# Altium PCB bag_alamr_v1.PcbDoc
Units mil, origin at the board's own origin, x right, y up, seen from the top; angles counter-clockwise.
Board outline 1440 x 1440 mil, 4 copper layers (Top Layer, GND, 3v3, Bottom Layer), stack 29.645 mil thick; 50 components, 43 nets, 179 pads, 139 vias.
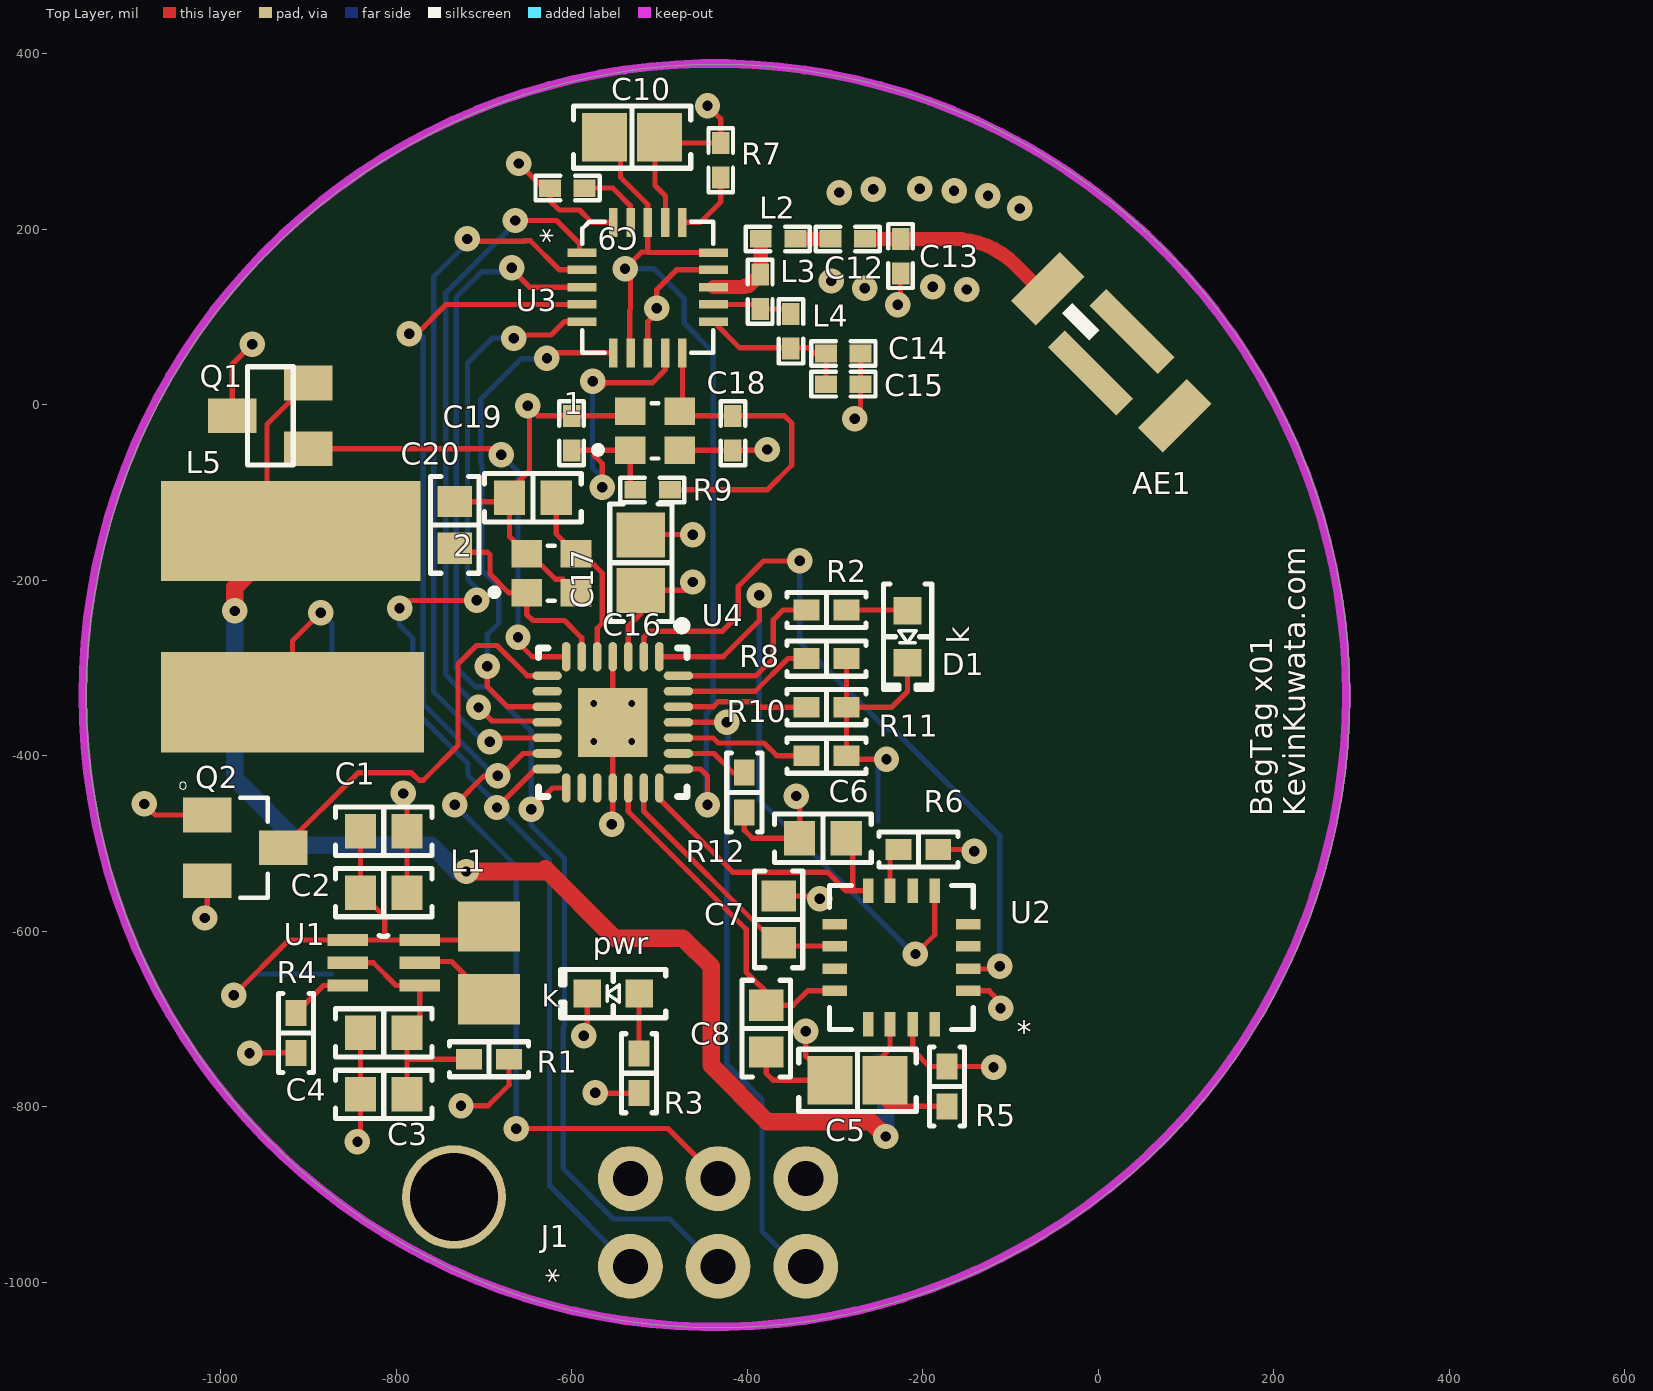
[diagram p0: Top Layer view]
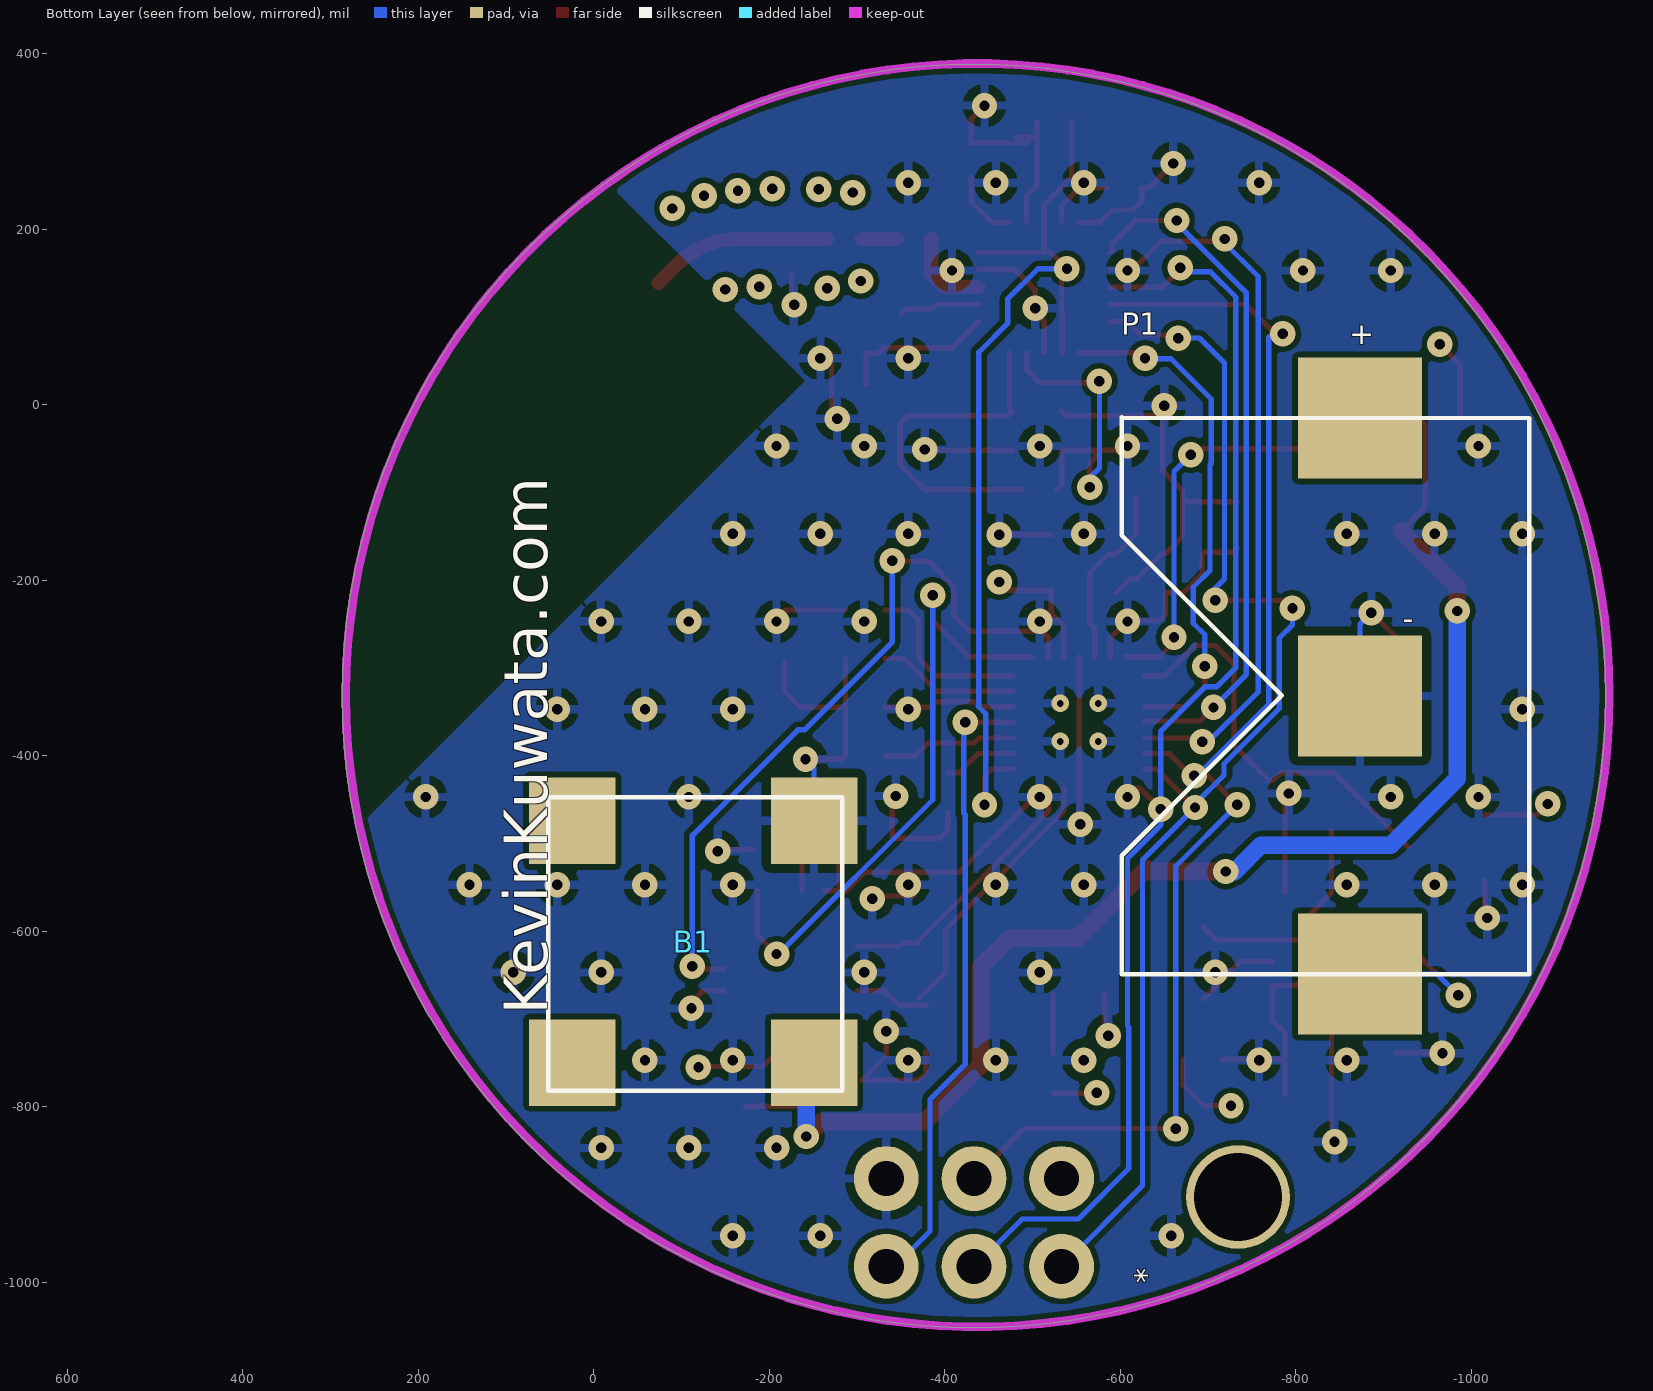
[diagram p1: Bottom Layer view, seen from below]
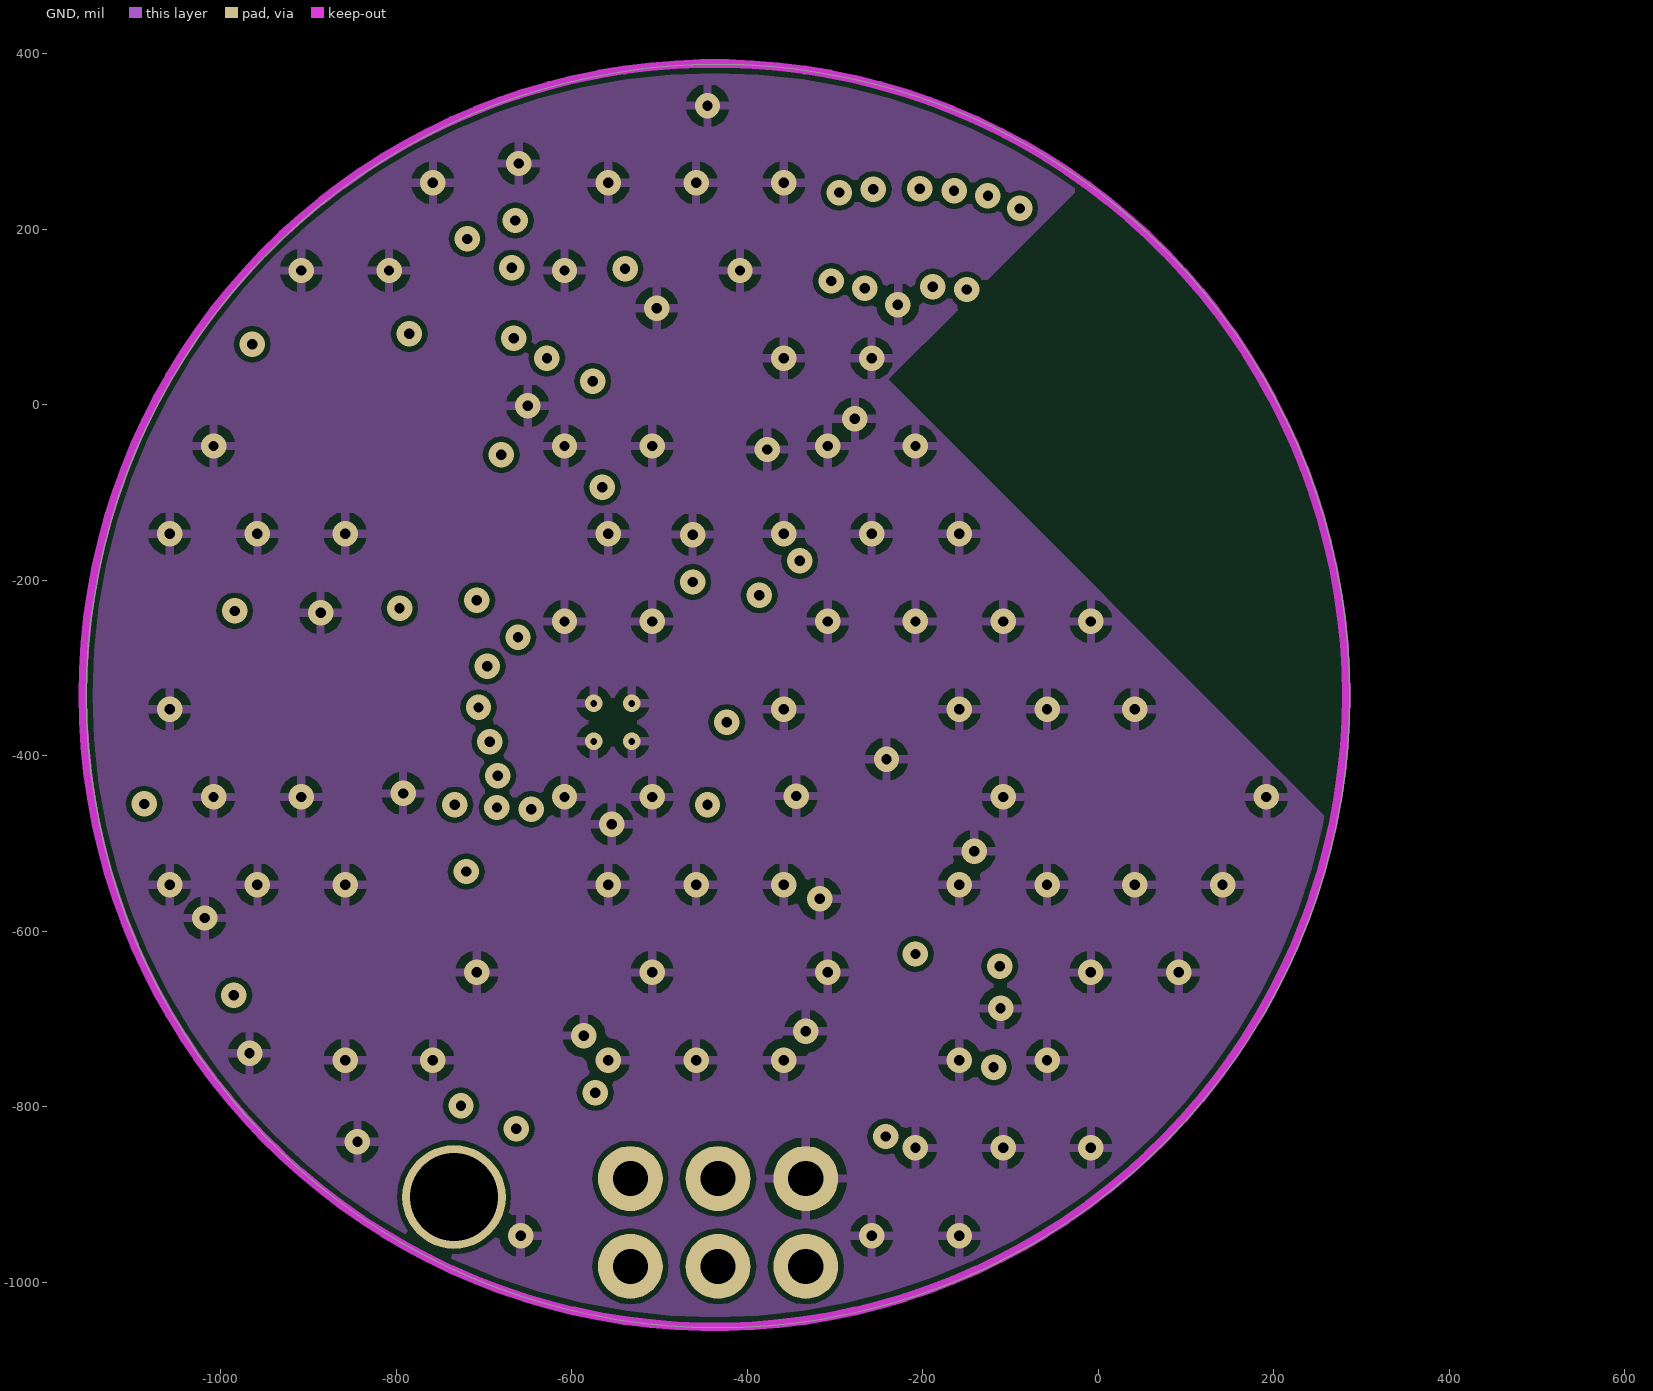
[diagram p2: GND]
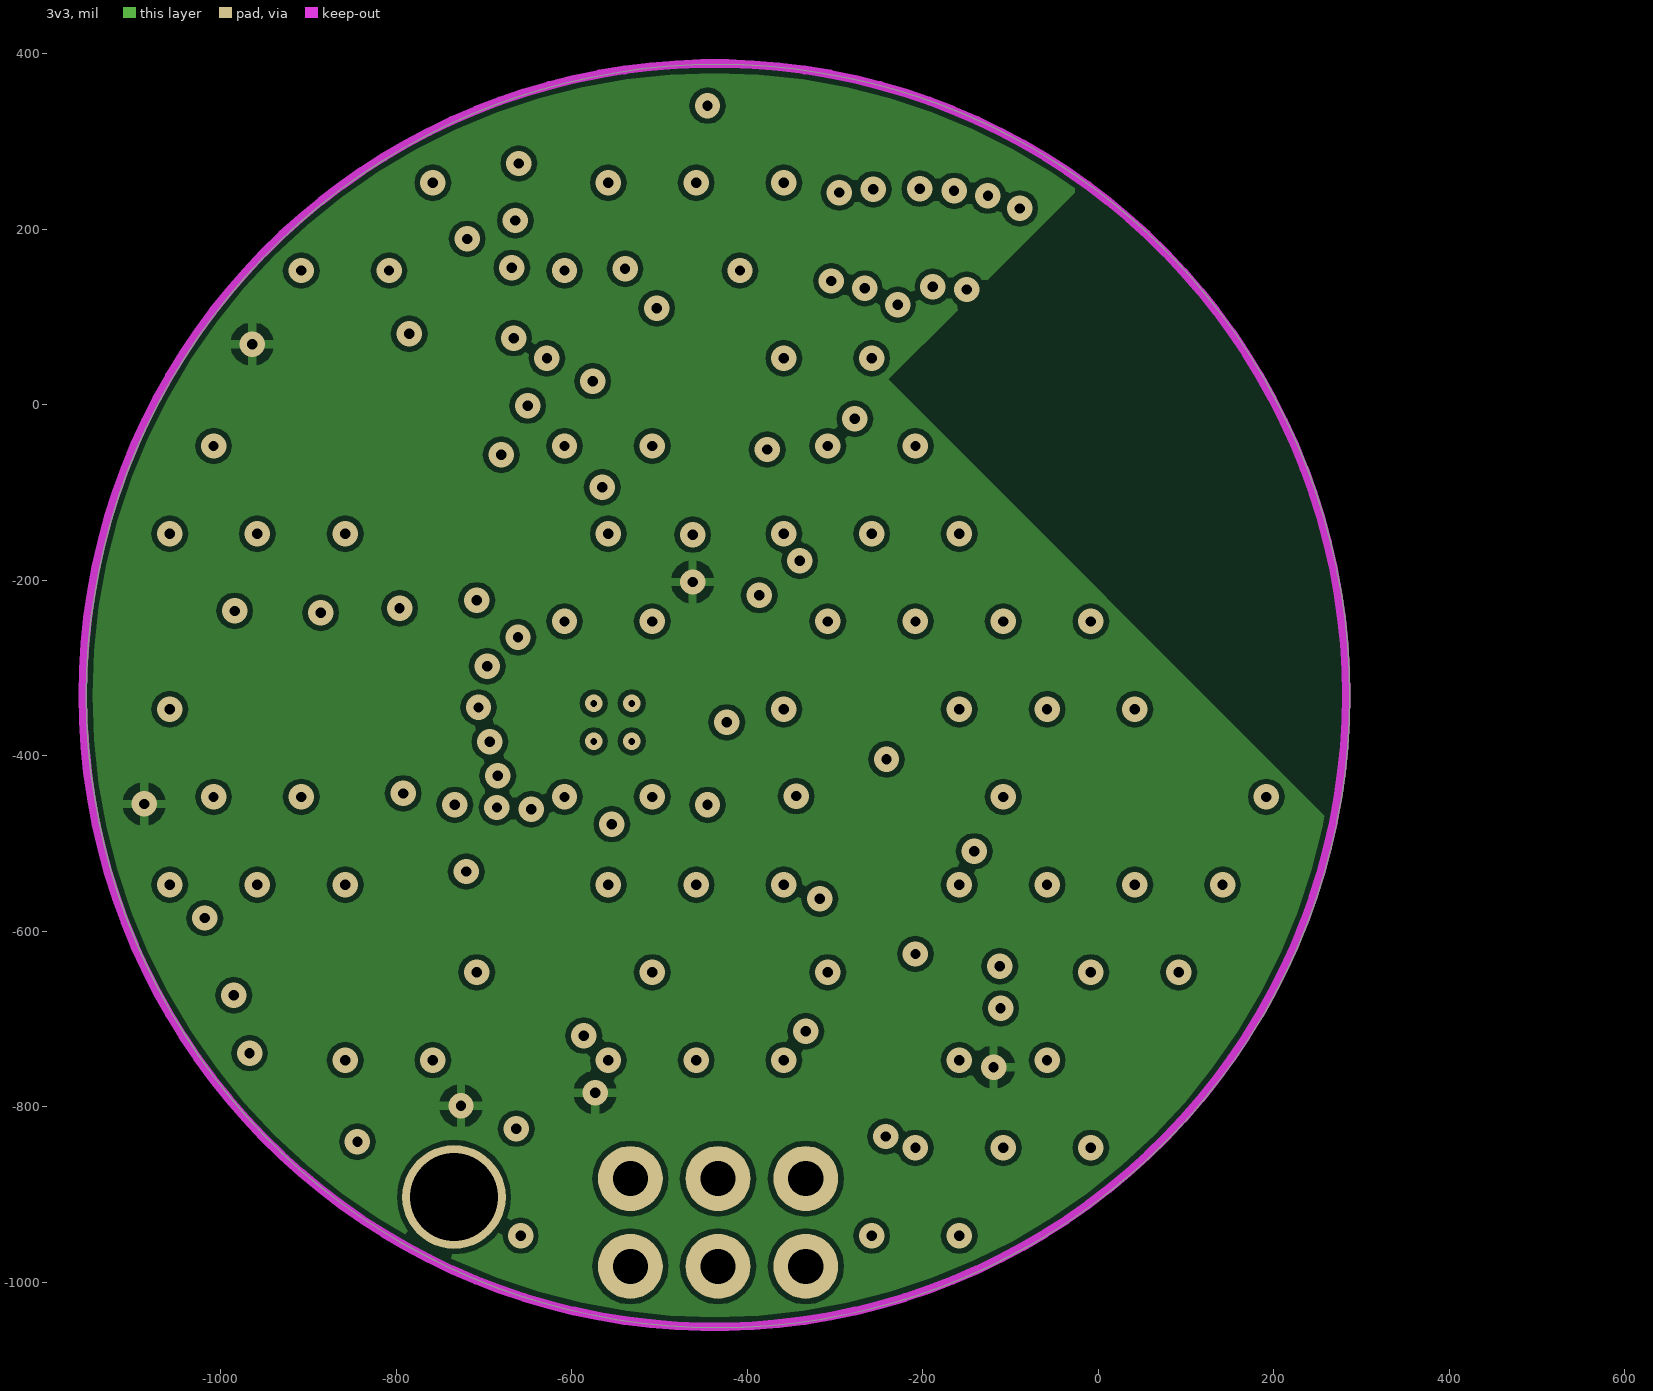
[diagram p3: 3v3]

## Layer stack, top to bottom
Top Solder: solder mask 0.394, Solder Resist, Dk 3.5
Top Layer: signal copper 1.378
Dielectric 1: core 9.055, FR-4, Dk 4.2
GND: signal copper 1.417
Dielectric 6: prepreg 5, Dk 4.2
3v3: signal copper 1.417
Dielectric 5: core 10, Dk 4.2
Bottom Layer: signal copper 1.378
Bottom Solder: solder mask 0.394, Solder Resist, Dk 3.5

## Board outline
-1153.17,-331.83 ccw(c-433.17,-331.83) -433.17,-1051.83 ccw(c-433.17,-331.83) 286.83,-331.83 ccw(c-433.17,-331.83) -433.17,388.17 ccw(c-433.17,-331.83)

## Design rules (kind name [scope] priority, off if disabled: settings)
Clearance "Stitching GND" [IsStitchingVia and InNet('GND') vs (IsVia and (Not IsStitchingVia)) Or IsPad] p1: gap=6 ignorepadtopadclearanceinfootprint=FALSE
Clearance [All] p2: gap=6 ignorepadtopadclearanceinfootprint=FALSE except(4: SMDPad-SMDPad)
ComponentClearance [All] p1: gap=1 collisioncheckmode=3 verticalgap=5 showdistances=FALSE
HoleSize [All] p1: absolutevalues=TRUE maxlimit=100 minlimit=11.81 maxpercent=80.000 minpercent=20.000
PlaneConnect [All] p1: planeconnectstyle=Relief reliefexpansion=10 reliefentries=4 reliefconductorwidth=10 reliefairgap=10
PolygonConnect [All] p1: connectstyle=Relief reliefconductorwidth=10 reliefentries=4 polygonreliefangle="90 Angle" airgapwidth=10
RoutingVias [All] p1: holewidth=11.81 width=29 viastyle="Through Hole" minholewidth=11.81 minwidth=29 maxholewidth=11.81 maxwidth=29
SolderMaskExpansion [IsVia] p1: expansion=-20
Width [All] p1: maxlimit=70 minlimit=6 preferedwidth=6.5
27 further rules are at their usual default settings.

## Components (designator, comment, footprint, x,y, rotation, side; value= is the part's Value field where it differs from the comment)
1 "FA238" OSCCC200X160X50 -505.02,-29.58 r0 top
2 "FA238" OSCCC200X160X50 -623.17,-191.83 r0 top
AE1 "2450AT42B100E" XCVR_2450AT42B100E 15,60 r315 top
B1 "buzz" 5v_piezo_CUINC -113.17,-611.83 r180 bottom
C1 "47uF" "CAP 0603/1608" -814.17,-485.83 r180 top
C2 "47uF" "CAP 0603/1608" -814.17,-555.83 r180 top
C3 "47uF" "CAP 0603/1608" -814.17,-785.83 r0 top
C4 "47uF" "CAP 0603/1608" -814.17,-715.83 r0 top
C5 "10uF" "CAP 0805/2012" -274.17,-769.83 r0 top
C6 "30nF" "CAP 0603/1608" -313.6,-493.83 r0 top
C7 "30nF" "CAP 0603/1608" -364.17,-586.4 r270 top
C8 "30nF" "CAP 0603/1608" -378.17,-710.83 r90 top
C9 "33nF" 0402s -585.17,247.17 r180 top
C10 "10uF" "CAP 0805/2012" -531.17,305.17 r180 top
C12 "1.5pF" 0402s -265.73,189.24 r180 top
C13 "1.0pF" 0402s -225.1,189.24 r270 top
C14 "2.2nF" 0402s -270.73,58.61 r180 top
C15 "4.7pF" 0402s -270.73,23.61 r180 top
C16 "10uF" "CAP 0805/2012" -521.17,-179.83 r270 top
C17 "15pF" 0402s -600.17,-51.83 r90 top
C18 "15pF" 0402s -416.17,-51.83 r90 top
C19 "22pF" "CAP 0603/1608" -644.17,-105.83 r0 top
C20 "22pF" "CAP 0603/1608" -733.17,-136.83 r270 top
D1 "Blue" "LED 0603/1608 BLUE" -217.17,-264.3 r270 top value=Green
J1 "AVR ISP 6 Pin" 2X3-NS -433.17,-931.83 r0 top locked
L1 "4.7uH" 4_7 -694.17,-635.83 r270 top
L2 "3.9nH" 0402s -384.47,189.24 r0 top
L3 "6.8nH" 0402s -385.1,148.61 r270 top
L4 "3.3nH" 0402s -350.1,64.24 r90 top
L5 "33mH" PCBComponent_1 -1070.17,-398.83 r0 top
P1 "CR232Coin" Battery_clip -873.17,-648.76 r90 bottom locked
pwr "Blue" "LED 0603/1608 BLUE" -552.7,-670.88 r180 top value=Green
Q1 "MMBT2222A" SOT23 -943.48,-12.43 r90 top
Q2 "ah180N" SOT95P240X110-3N -972.17,-504.83 r270 top
R1 "0.0" "RES 0402/1005" -694.17,-745.83 r180 top
R2 "150 ohm" "RES 0402/1005" -309.54,-233.83 r0 top
R3 "150 ohm" "RES 0402/1005" -523.17,-761.83 r90 top
R4 "0.0" "RES 0402/1005" -914.17,-715.83 r90 top
R5 "0.0" "RES 0402/1005" -172.17,-776.83 r90 top
R6 "0.0" "RES 0402/1005" -204.81,-506.83 r180 top
R7 "22K" 0402s -430.1,259.24 r90 top
R8 "10k" "RES 0402/1005" -309.54,-289.16 r0 top
R9 "1M" 0402s -527.54,-96.83 r0 top
R10 "10k" "RES 0402/1005" -309.54,-344.49 r0 top
R11 "10k" "RES 0402/1005" -309.54,-399.83 r0 top
R12 "10k" "RES 0402/1005" -403.17,-441.83 r270 top
U1 "TPS61221DCKT" SOT65P210X110-6N -814.17,-635.83 r0 top
U2 "LIS344ALHTR" LGA16R65P4X4_400X400X160 -224.17,-629.83 r180 top
U3 "NRF24L01" QFN20L/5x5 -580.1,173.61 r0 top
U4 "atmeag328p" yy] -553.17,-361.83 r270 top

## Footprints (in the part's own frame and the unit in brackets; to place one, negate y for a bottom-side part, rotate by r counter-clockwise, add the part's x,y. Pads: shape width x height; smd on the part's side, far side on the other; paste and mask are expansions set on the pad)
2X3-NS [mil]
  round 74 hole 40: 1(-100,-50) 2(-100,50) 3(0,-50) 4(0,50) 5(100,-50) 6(100,50)
4_7 [mm] "Chip Inductor, 2-Leads, Body 2.70x1.65mm, IPC Medium Density"
  rect 1.45x1.79 smd: 1(-1.055,0) 2(1.055,0)
  body extent -1.35,-0.82 1.35,0.82, height 1.2
5v_piezo_CUINC [mm] "cuinc cmt-8540s-smt 8.5mm square"
  rect 2.5x2.5 smd: 1(3.5,3.5) 2(3.5,-3.5) 3(-3.5,-3.5) 4(-3.5,3.5)
  silkscreen extent -4.19,-4.32 4.32,4.18
0402s [mil]
  rect 25x20 smd: 1(0,0) 2(39.37,0)
  silkscreen extent -17,-14 56,14
Battery_clip [mm] "S8201R battery clip"
  rect 3.5x3.6 smd: 1(0,0) 2(8.05,0) 3(16.1,0)
  silkscreen extent 0,-4.9 16.13,6.9
"CAP 0603/1608" [mm] "Chip Capacitor, 2-Leads, Body 1.60x0.80mm, IPC Medium Density"
  rect 0.9x1 smd: 1(-0.675,0) 2(0.675,0)
  silkscreen extent -1.4,-0.7 1.4,0.7, body extent -0.8,-0.41 0.8,0.41, height 0.82
"CAP 0805/2012" [mm] "Chip Capacitor, 2-Leads, Body 2.00x1.20mm, IPC Medium Density"
  rect 1.3x1.4 smd: 1(-0.8,0) 2(0.8,0)
  silkscreen extent -1.7,-0.9 1.7,0.9, body extent -1,-0.64 1,0.64, height 1.26
"LED 0603/1608 BLUE" [mm] "Chip Diode, 2-Leads, Body 1.60x0.80mm, IPC Medium Density"
  rect 0.8x0.8 smd: 1(-0.75,0) 2(0.75,0)
  silkscreen extent -1.52,-0.7 1.52,0.7, body extent -0.8,-0.4 0.8,0.4, height 0.53
LGA16R65P4X4_400X400X160 [mil]
  rect 28x12 smd: 1(-76,38) 2(-76,13) 3(-76,-13) 4(-76,-38) 9(76,-38) 10(76,-13) 11(76,13) 12(76,38)
  rect 12x28 smd: 5(-38,-76) 6(-13,-76) 7(13,-76) 8(38,-76) 13(38,76) 14(13,76) 15(-13,76) 16(-38,76)
  silkscreen extent -82,-82 82,82
OSCCC200X160X50 [mm]
  rect 0.89x0.79 smd: 1(-0.715,-0.565) 2(0.715,-0.565) 3(0.715,0.565) 4(-0.715,0.565)
  silkscreen extent -1.75,-0.8 0.1,0.8
PCBComponent_1 [mm]
  rect 7.6x2.9 smd: 1(3.86,1.524)
  rect 7.5x2.9 smd: 2(3.81,6.477)
QFN20L/5x5 [mm]
  rect 0.84x0.25 smd: 1(-0.203,0) 2(-0.203,-0.5) 3(-0.203,-1) 4(-0.203,-1.5) 5(-0.203,-2) 11(3.603,-2) 12(3.603,-1.5) 13(3.603,-1) 14(3.603,-0.5) 15(3.603,0)
  rect 0.25x0.84 smd: 6(0.7,-2.903) 7(1.2,-2.903) 8(1.7,-2.903) 9(2.2,-2.903) 10(2.7,-2.903) 16(2.7,0.878) 17(2.2,0.878) 18(1.7,0.878) 19(1.2,0.878) 20(0.7,0.878)
  silkscreen extent -0.19,-2.89 3.59,0.89
"RES 0402/1005" [mm] "Chip Resistor, 2-Leads, Body 1.0x0.5mm, IPC Medium Density"
  rect 0.75x0.6 smd: 1(-0.575,0) 2(0.575,0)
  silkscreen extent -1.14,-0.51 1.14,0.51, body extent -0.5,-0.25 0.5,0.25, height 0.35
SOT23 [mm]
  rect 1x1.4 smd: 1(-0.95,-1.1) 2(0.95,-1.1) 3(0,1.1)
  silkscreen extent -1.42,-0.66 1.42,0.66
SOT65P210X110-6N [mil]
  rect 46x14 smd: 1(-41,26) 2(-41,0) 3(-41,-26) 4(41,-26) 5(41,0) 6(41,26)
  silkscreen extent -5,30 5,31
SOT95P240X110-3N [mm]
  rect 1x1.4 smd: 1(-0.95,-1.1) 2(0.95,-1.1) 3(0,1.1)
  silkscreen extent -1.9,-1.9 1.45,0.65
XCVR_2450AT42B100E [mm]
  rect 1x2 smd: 1(-2.6,0) 2(2.6,0)
  rect 2.8x0.7 smd: 3(0,-0.85) 4(0,0.85)
  silkscreen extent -1.81,-0.2 -0.7,0.2
yy] [mm] "QFN, 28-Leads, Body 3.98x3.98mm, Pitch 0.45mm, Thermal Pad 2.00x2.00mm, IPC Medium Density"
  oval 0.85x0.25 smd: 1(-1.9,1.35) 2(-1.9,0.9) 3(-1.9,0.45) 4(-1.9,0) 5(-1.9,-0.45) 6(-1.9,-0.9) 7(-1.9,-1.35) 15(1.9,-1.35) 16(1.9,-0.9) 17(1.9,-0.45) 18(1.9,0) 19(1.9,0.45) 20(1.9,0.9) 21(1.9,1.35)
  oval 0.25x0.85 smd: 8(-1.35,-1.9) 9(-0.9,-1.9) 10(-0.45,-1.9) 11(0,-1.9) 12(0.45,-1.9) 13(0.9,-1.9) 14(1.35,-1.9) 22(1.35,1.9) 23(0.9,1.9) 24(0.45,1.9) 25(0,1.9) 26(-0.45,1.9) 27(-0.9,1.9) 28(-1.35,1.9)
  rect 2x2 smd: 29(0,0)
  silkscreen extent -2.92,-2.15 2.15,2.15, body extent -2.05,-2.05 2.05,2.05, height 0.95

## Part data
1 2: "FA238 4 pin can crstyal"
AE1: "Antenna Chip 2.4ghz", Package=None, Availability=Good, MF=Johanson, MP=2450AT42B100E, Price="0.45 USD", SnapEDA_Link=https://www.snapeda.com/symbols-footprints/2450AT42B100E/Johanson/view-part/?ref=snap
B1: library part cmt-8540s-smt, "5v piezo smd 8.5mm square"
C1 C2 C3 C4 C6 C7 C8: library part C1608X7R1E104K080AA, "CAP CER 0.1UF 25V X7R 0603", Device Package="0603 (1608 Metric)", Manufacturer="TDK Corporation", Supplier Part Number 1=445-1316-1-ND, TemperatureCoefficient=X7R, TemperatureRange="-55C ~ 125C", Tolerance=10%, Voltage=25V, ComponentLink1Description=Datasheet, ComponentLink1URL=https://product.tdk.com/info/en/catalog/datasheets/mlcc_commercial_general_en.pdf, ComponentLink2Description="Digi-Key listing", ComponentLink2URL=http://digikey.com/product-detail/en/C1608X7R1E104K080AA/445-1316-1-ND/567697, PartId=4029, Part Number=C1608X7R1E104K080AA, Price=0.14, Supplier 1=Digi-Key, Type=-
C5 C10 C16: library part C2012X7R0J106K125AB, "CAP CER 10UF 6.3V X7R 0805", Part Number=C2012X7R0J106K125AB
C9 C12 C13 C14 C15 C17 C18: library part CAP, Part Field 1=0402
C19 C20: library part C1608C0G1H220J080AA, "CAP CER 22PF 50V C0G 0603", Device Package="0603 (1608 Metric)", Manufacturer="TDK Corporation", Supplier Part Number 1=445-1273-1-ND, TemperatureCoefficient="C0G, NP0", TemperatureRange="-55C ~ 125C", Tolerance=5%, Voltage=50V, ComponentLink1Description=Datasheet, ComponentLink1URL=https://product.tdk.com/info/en/catalog/datasheets/mlcc_commercial_general_en.pdf, ComponentLink2Description="Digi-Key listing", ComponentLink2URL=http://digikey.com/product-detail/en/C1608C0G1H220J080AA/445-1273-1-ND/567670, PartId=4031, Part Number=C1608C0G1H220J080AA, Price=0.14, Supplier 1=Digi-Key, Type=-
D1 pwr: library part HSMR-C190, "LED BLUE DIFFUSED 0603 SMD", Current (Test)=20mA, Device Package="0603 (1608 Metric)", Manufacturer="Avago Technologies US Inc.", Supplier Part Number 1=516-2502-2-ND, Voltage Forward=3.4V, Colour=Blue, ComponentLink1Description=Datasheet, ComponentLink1URL=http://www.avagotech.com/docs/AV02-0977EN, ComponentLink2Description="Digi-Key Listing", ComponentLink2URL=http://www.digikey.ca/product-detail/en/HSMR-C190/516-2502-2-ND/1235444, Lens Transparency=Diffused, Millicandela=55mcd, PartId=7058, Part Number=HSMR-C190, Price=0.3614, Supplier 1=Digi-Key, Type="Surface Mount", Viewing Angle=155
J1: library part AVR_SPI_PROG_3X2NS
L1: "4.7 uH inductor pulse PA4335.XXXNLT  arrow"
L2 L3 L4: library part INDUCTOR1, Part Field 1=0402
L5: library part Component_1kmp2200rm, "33mH inductor for piezo"
P1: library part S8201R, "coin cell for cr232 and uses smd"
Q1: "TRANS NPN 40V 1A SOT-23", Package="SOT-23 ON Semiconductor", Availability=Good, MF="ON Semiconductor", MP=MMBT2222A, Price="0.06 USD"
Q2: "Hall effect switch digikey, sc59"
R1 R4 R5 R6: library part RC0402JR-070RL, "RES SMD 0.0OHM JUMPER 1/16W 0402", Device Package="0402 (1005 Metric)", Manufacturer=Yageo, PowerRating="0.063W, 1/16W", Supplier Part Number 1=311-0.0JRTR-ND, TemperatureRange="-55C ~ 155C", Tolerance=Jumper, ComponentLink1Description=Datasheet, ComponentLink1URL=http://www.yageo.com/documents/recent/PYu-RC_Group_51_RoHS_L_04.pdf, ComponentLink2Description="Digi-Key Listing", ComponentLink2URL=https://www.digikey.com/product-detail/en/yageo/RC0402JR-070RL/311-0.0JRTR-ND/726406, PartId=16128, Part Number=RC0402JR-070RL, Price=0.0019, Supplier 1=Digi-Key
R2 R3 R8 R10 R11 R12: library part ERJ-2RKF1002X, "RES SMD 10K OHM 1% 1/10W 0402", Device Package="0402 (1005 Metric)", Manufacturer="Panasonic Electronic Components", PowerRating="0.1W, 1/10W", Supplier Part Number 1=P10.0KLTR-ND, TemperatureCoefficient=100ppm/C, TemperatureRange="-55C ~ 155C", Tolerance=1%, ComponentLink1Description=Datasheet, ComponentLink1URL=http://industrial.panasonic.com/www-cgi/jvcr13pz.cgi?E+PZ+3+AOA0002+ERJ2RKF1002X+7+WW, ComponentLink2Description="Digikey listing", ComponentLink2URL=http://digikey.com/product-detail/en/ERJ-2RKF1002X/P10.0KLTR-ND/192073, PartId=1, Part Number=ERJ-2RKF1002X, Price=0.0043, Supplier 1=Digi-Key, Type="Thick Film"
R7 R9: library part RES2, Part Field 1=0402
U1: "Tiny Low Input Voltage Boost Converter 6-SC70 -40 to 85", Package="SC-70-6 Texas Instruments", Availability=Good, MF="Texas Instruments", MP=TPS61221DCKT, Price="0.97 USD"
U2: "MEMS inertial sensor high performance 3-axis ±2/ ±6g ultracompact linear accelerometer", Package="LGA-16 STMicroelectronics", Availability=Good, MF=STMicroelectronics, MP=LIS344ALHTR, Price="2.81 USD", SnapEDA_Link=https://www.snapeda.com/symbols-footprints/LIS344ALHTR/STMicroelectronics/view-part/?ref=snap
U4: library part 328p_28QFN, "28 pin qfn, or mlf 28 pin compatible with uno"
U3: Part Field 1=0603

## Free pads (board coordinates)
  round 118.11 hole 100: 2(-734.17,-902.83)

## Via types
v1: diameter 29, hole 11.81, Top Layer to Bottom Layer, 68 vias
v2: diameter 29/29/29 (per signal layer), hole 11.81, GND to Bottom Layer, tented bottom, 67 vias
v3: diameter 19.68, hole 7.87, Top Layer to Bottom Layer, 4 vias

## Nets (pads, with @x,y where several pads share a name; then routed paths per layer and width w, separated by ;. In a path a pad name is that pad's centre, name@x,y a point inside that pad or via, vN(x,y) a via of type N, cw(c..) or ccw(c..) an arc to the next point about the centre after c; other vN are vias at no path point)
3.3V: C16.2 Q1.3 Q2.1 R1.1 R3.1 R5.2 U2.15 U4.3 | length 586.4
  Top Layer w6: v1(-1087.17,-454.83) -1074.57,-467.43 Q2.1 ; Q1.3 -986.79,46.56 v1(-964.17,69.17) ; v1(-726.17,-798.83) -695.17,-798.83 -671.17,-774.83 -671.54,-774.46 R1.1 ; v1(-573.17,-783.83) -572.54,-784.46 R3.1 ; U4.3 -535.46,-252.11 -521.17,-237.83 C16.2 -471.67,-211.32 v1(-462.17,-201.83) ; U2.15 -211.17,-735.45 -192.44,-754.19 R5.2 -130.81,-754.19 -130.17,-754.83 v1(-119.17,-754.83)
CE: U3.1 U4.11 | length 784.3
  Top Layer w6: v1(-706.17,-344.83) -690.67,-360.33 -629.48,-360.33 U4.11 ; v1(-664.17,210.17) -617.17,210.17 -591.17,184.17 -591.17,176.69 U3.1
  Bottom Layer w6: v1(-706.17,-344.83) -743.64,-307.36 -743.64,127.7 -664.17,207.17 v1(-664.17,210.17)
CSN: U3.2 U4.12 | length 835.6
  Top Layer w6: v1(-719.17,189.17) -716.67,186.67 -654.44,186.67 -653.94,187.17 -647.17,187.17 -613.93,153.93 U3.2 ; v1(-693.17,-383.83) -688.89,-379.54 U4.12
  Bottom Layer w6: v1(-719.17,189.17) -718.17,189.17 -716.17,187.17 -757.17,146.17 -757.17,-327.06 -700.41,-383.83 v1(-693.17,-383.83)
DC_DC_FB: C3.2 C4.2 R1.2 U1.2 U1.4 | length 293.5
  Top Layer w6: U1.2 -826.17,-635.83 -800.17,-661.83 U1.4 -773.17,-701.4 C4.2 -787.6,-745.83 ; C3.2 -787.6,-745.83 ; R1.2 -787.6,-745.83
GND: 1.2 1.4 2.2 2.4 B1.1 C1.1 C2.1 C3.1 C4.1 C5.1 C6.1 C7.1 C8.1 C9.2 C10.1 C13.2 C14.1 C15.1 C16.1 C17.2 C18.1 C19.1 C20.1 D1.2 J1.6 L5.1 P1.2 pwr.2 Q2.2 R4.1 R6.1 R7.2 R8.2 R10.2 R11.2 R12.2 U2.1 U3.8 U3.14 U3.17 U3.20 U4.4 U4.18 U4.29 | length 2870.3
  Top Layer w6: v1(-1018.17,-584.83) -1019.17,-585.83 -1019.17,-587.83 -1015.48,-584.13 Q2.2 ; v1(-967.17,-738.83) -966.81,-738.46 R4.1 ; L5.1 -918.2,-268.86 v1(-886.17,-236.83) ; v1(-844.17,-839.83) -844.17,-840.83 -840.75,-837.4 C3.1 C4.1 ; v1(-792.17,-442.83) -787.6,-447.4 C1.1 C2.1 ; C20.1 -675.17,-110.25 C19.1 ; v1(-660.17,275.17) -632.17,247.17 C9.2 -624.54,232.54 -614.17,222.17 -591.17,222.17 -577.17,208.17 U3.20 ; v1(-650.17,-0.83) v1@-648.17,-2.83 ; 2.2 -610.27,-198.83 -618.17,-198.83 -647.42,-169.58 2.4 -670.75,-150.16 C19.1 ; v1(-586.17,-718.83) -582.23,-714.88 pwr.2 ; v1(-554.17,-477.83) -553.17,-476.83 U4.18 U4.29 U4.4 ; 1.4 -538.29,-12.46 C17.2 -638.54,-12.46 v1@-648.17,-2.83 ; C16.1 -520.67,-147.83 v1(-462.17,-147.83) ; U3.8 -513.17,95.17 -503.17,105.17 v1(-503.17,110.17) -503.17,131.17 -480.42,153.93 U3.14 ; C10.1@-505.1,323.61 -505.1,250.1 -493.17,238.17 -493.17,208.49 U3.17 ; C10.1@-481.17,305.17 C10.1 -493.12,298.61 R7.2 -430.17,298.69 -430.17,326.17 v1(-445.17,341.17) ; 1.2 C18.1 -378.17,-51.83 v1(-377.17,-50.83) ; R12.2 -403.17,-484.83 -394.17,-493.83 C6.1 -340.17,-449.83 v1(-344.17,-445.83) ; C8.1 -378.17,-761.83 -370.17,-769.83 C5.1 -333.17,-742.32 v1(-333.17,-713.83) ; C7.1 -320.17,-559.83 v1(-317.17,-562.83) ; R8.2 R10.2 ; v1(-277.17,-15.83) -270.73,-9.39 C15.1 C14.1 ; v1(-241.17,-403.83) -280.9,-403.83 -281.9,-404.83 R11.2 R10.2 ; v1(-228.17,114.17) -225.1,117.24 C13.2 ; D1.2 -217.17,-326.67 -235,-344.49 R10.2 ; R6.1 -143.17,-506.83 v1(-141.17,-508.83) ; U2.1 -124.17,-667.83 -115.17,-676.83 -115.17,-684.83 -112.17,-687.83 v1(-111.17,-687.83) ; C19.1 -670.75,-97.4 -648.17,-74.83 v1@-648.17,-2.83
  GND w6: v1@-142.17,-503.83 -141.17,-504.83 v1(-141.17,-508.83)
  Bottom Layer w6: v1(-886.17,-236.83) -873.17,-249.83 P1.2 ; B1.1 -250.97,-413.62 v1(-241.17,-403.83)
  other v2: -658.17,-946.83 -258.17,-946.83 -158.17,-946.83 -208.17,-846.83 -108.17,-846.83 -8.17,-846.83 -858.17,-746.83 -758.17,-746.83 -558.17,-746.83 -458.17,-746.83 -358.17,-746.83 -158.17,-746.83 -58.17,-746.83 -708.17,-646.83 -508.17,-646.83 -308.17,-646.83 -8.17,-646.83 91.83,-646.83 -1058.17,-546.83 -958.17,-546.83 -858.17,-546.83 -558.17,-546.83 -458.17,-546.83 -358.17,-546.83 -158.17,-546.83 -58.17,-546.83 41.83,-546.83 141.83,-546.83 -1008.17,-446.83 -908.17,-446.83 -608.17,-446.83 -508.17,-446.83 -108.17,-446.83 191.83,-446.83 -1058.17,-346.83 -358.17,-346.83 -158.17,-346.83 -58.17,-346.83 41.83,-346.83 -608.17,-246.83 -508.17,-246.83 -308.17,-246.83 -208.17,-246.83 -108.17,-246.83 -8.17,-246.83 -1058.17,-146.83 -958.17,-146.83 -858.17,-146.83 -558.17,-146.83 -358.17,-146.83 -258.17,-146.83 -158.17,-146.83 -1008.17,-46.83 -608.17,-46.83 -508.17,-46.83 -308.17,-46.83 -208.17,-46.83 -358.17,53.17 -258.17,53.17 -908.17,153.17 -808.17,153.17 -608.17,153.17 -408.17,153.17 -758.17,253.17 -558.17,253.17 -458.17,253.17 -358.17,253.17
  other v3: -574.83,-383.48 -531.52,-383.48 -574.83,-340.17 -531.52,-340.17
IRQ: U3.6 U4.10 | length 592.2
  Top Layer w6: v1(-696.17,-297.83) -696.17,-320.83 -672.89,-344.11 U4.10 ; v1(-628.17,53.17) -622.03,59.32 U3.6
  Bottom Layer w6: v1(-696.17,-297.83) -696.17,-261.83 -683.17,-248.83 -683.17,-207.83 -702.17,-188.83 -702.17,-68.06 -703.67,-66.56 -703.67,6.67 -657.67,52.67 -628.67,52.67 v1(-628.17,53.17)
led0_digital_2: R2.1 U4.28 | length 203
  Top Layer w6: U4.28 -390.02,-308.68 -370.17,-288.83 -370.17,-244.83 -359.17,-233.83 R2.1
MISO: J1.1 U3.5 U4.14 | length 1456.8
  Top Layer w6: v1(-796.17,-231.83) -787.17,-222.83 v1(-708.14,-222.83) ; v1(-685.17,-458.83) -641.32,-414.98 U4.14 ; v1(-666.17,76.17) -662.67,79.67 -623.44,79.67 -608.24,94.87 U3.5
  Bottom Layer w6: v1(-796.17,-231.83) -796.17,-250.83 -781.17,-265.83 -781.17,-346.03 -718.17,-409.03 -718.17,-422.06 -685.17,-455.06 v1(-685.17,-458.83) -625.17,-518.83 -625.17,-889.83 J1.1 ; v1(-708.14,-222.83) -701.17,-215.86 -718.67,-198.36 -718.67,47.67 -690.17,76.17 v1(-666.17,76.17)
MOSI: J1.4 U3.4 U4.13 | length 1557.7
  Top Layer w6: v1(-785.17,81.17) -776.42,81.17 -743.04,114.56 U3.4 ; v1(-733.17,-455.83) -700.17,-422.83 v1(-684.17,-422.83) -681.17,-422.83 -655.61,-397.26 U4.13 ; v1(-663.17,-824.83) -490.17,-824.83 J1.4
  Bottom Layer w6: v1(-785.17,81.17) -785.17,87.17 -782.17,90.17 -769.17,77.17 -769.17,-341.06 -687.41,-422.83 v1(-684.17,-422.83) ; v1(-733.17,-455.83) -663.17,-525.83 v1(-663.17,-824.83)
Net1_1: 1.1 C17.1 R9.1 U3.9 | length 402.1
  Top Layer w6: C17.1 -568.17,-51.83 ; v1(-576.17,27.17) -575.17,27.17 -567.17,19.17 -561.17,25.17 -508.17,25.17 -493.49,39.86 U3.9 ; v1(-565.17,-93.83) -565.17,-66.83 -574.17,-57.83 -568.17,-51.83 ; R9.1 -533.17,-91.2 1.1 -568.17,-51.83
  Bottom Layer w6: v1(-576.17,27.17) -576.17,-71.83 -565.17,-82.83 v1(-565.17,-93.83)
Net1_3: 1.3 C18.2 R9.2 U3.10 | length 399.8
  Top Layer w6: R9.2 -377.17,-96.83 -349.17,-68.83 -349.17,-20.83 -357.54,-12.46 C18.2 -471.76,-12.46 1.3 -473.8,-4.27 U3.10
Net2_1: 2.1 C20.2 U4.6 | length 235.7
  Top Layer w6: C20.2 -728.75,-167.83 -696.17,-167.83 -693.17,-170.83 -693.17,-192.83 -671.93,-214.07 2.1 -651.32,-238.68 -644.17,-245.83 -608.17,-245.83 -588.61,-265.39 U4.6
Net2_3: 2.3 C19.2 U4.5 | length 209.9
  Top Layer w6: C19.2 -617.6,-147.01 2.3 -587.08,-169.58 -565.17,-191.49 -565.17,-248.83 -570.89,-254.54 U4.5
NetAE1_1: AE1.1 C12.1 C13.1 | length 208.7
  Top Layer w16.15: C12.1 C13.1 -165.28,189.24 cw(c-165.28,89.24) -94.57,159.95 AE1.1@-73.59,138.97
NetB1_2: B1.2 L5.2 Q1.2 | length 1582.1
  Top Layer w6: L5.2 -947.17,-116.83 -947.17,-22.02 Q1.2
  Top Layer w20: v1(-984.17,-234.83) -984.17,-207.83 L5.2 ; v1(-720.17,-531.83) -633.17,-531.83 -630.17,-528.83 -551.17,-607.83 -473.17,-607.83 -441.17,-639.83 -441.17,-752.83 -377.17,-816.83 -259.17,-816.83 v1(-242.17,-833.83)
  Bottom Layer w20: v1(-984.17,-234.83) -984.17,-425.83 -908.17,-501.83 -760.17,-501.83 -730.17,-531.83 v1(-720.17,-531.83) ; B1.2 -234.17,-766.42 -242.17,-774.42 v1(-242.17,-833.83)
NetC1_2: C1.2 C2.2 L1.1 P1.1 U1.1 U1.6 | length 581.3
  Top Layer w6: v1(-985.17,-672.83) -922.17,-609.83 U1.1 -812.17,-609.83 ; C1.2 C2.2 -813.17,-583.4 -813.17,-608.83 -812.17,-609.83 ; L1.1 -709.71,-609.83 U1.6 -812.17,-609.83
  Bottom Layer w6: v1(-985.17,-672.83) -961.1,-648.76 P1.1
NetC5_2: C5.2 R5.1 U2.14 | length 169.2
  Top Layer w6: U2.14 -237.17,-733.83 -247.6,-744.25 -247.6,-792.4 -240.54,-799.46 R5.1
NetC6_2: C6.2 U2.8 U4.21 | length 344.3
  Top Layer w6: U4.21 -500.02,-448.98 -416.49,-532.51 -308.49,-532.51 -287.17,-553.83 -278.02,-553.83 ; C6.2@-279.6,-503.83 -279.6,-552.24 -278.02,-553.83 ; U2.8 -278.02,-553.83
NetC7_2: C7.2 U2.10 U4.20 | length 307.8
  Top Layer w6: U4.20 -517.74,-463.26 -368.02,-612.98 C7.2 -351.17,-612.98 -347.32,-616.83 U2.10
NetC8_2: C8.2 U2.12 U4.19 | length 393.2
  Top Layer w6: U4.19 -535.46,-463.31 -401.17,-597.59 -401.17,-646.25 C8.2@-370.67,-676.75 ; C8.2 -347.6,-684.25 -331.17,-667.83 U2.12
NetC9_1: C9.1 U3.19 | length 79.4
  Top Layer w6: C9.1 -553.17,247.17 -532.86,226.86 U3.19
NetC10_2: C10.2 U3.7 U3.15 U3.18 U4.22 | length 1115.9
  Top Layer w6: C10.2@-544.47,323.61 -544.47,259.47 -513.17,228.17 U3.18 -513.17,174.17 ; U3.7 -533.67,60.13 -533.67,107.91 -532.86,108.72 -532.86,148.86 v1(-539.17,155.17) -520.17,174.17 -513.17,174.17 ; U4.22 -453.02,-414.98 -445.17,-422.83 v1(-445.17,-455.83) ; U3.15 -512.61,173.61 -513.17,174.17
  Bottom Layer w6: v1(-539.17,155.17) -506.17,155.17 -471.56,120.56 -471.56,92.79 -438.67,59.91 -438.67,-344.09 -446.67,-352.09 -446.67,-454.33 v1(-445.17,-455.83)
NetC12_2: C12.2 L2.2 | length 40
  Top Layer w16.15: L2.2 C12.2
NetC14_2: C14.2 C15.2 L4.1 U3.11 | length 178.2
  Top Layer w6: U3.11 -408.54,65.17 -330.17,65.17 -323.61,58.61 C14.2 C15.2
NetD1_1: D1.1 R2.2 | length 70.1
  Top Layer w6: R2.2 -218.12,-233.83 D1.1
NetJ1_2: J1.2
NetJ1_5: J1.5 U4.25 | length 719.6
  Top Layer w6: U4.25 v1(-423.17,-361.83)
  Bottom Layer w6: v1(-423.17,-361.83) -421.67,-363.33 -421.67,-465.56 -423.17,-467.06 -423.17,-751.83 -383.17,-791.83 -383.17,-941.83 -343.17,-981.83 J1.5
NetL1_2: L1.2 U1.5 | length 97.4
  Top Layer w6: U1.5 -771.71,-634.36 -737.17,-634.36 L1.2
NetL2_1: L2.1 L3.1 U3.13 | length 100.9
  Top Layer w16.15: U3.13 -402.51,134.24 -402.51,135.82 -397.9,135.82 L3.1 -384.47,149.24 L2.1
NetL3_2: L3.2 L4.2 U3.12 | length 92.7
  Top Layer w6: U3.12 -390.42,114.56 L3.2 -355.73,109.24 L4.2
Netpwr_1: pwr.1 R3.2 | length 68.3
  Top Layer w6: R3.2 pwr.1
NetQ1_1: Q1.1 U4.7 | length 508
  Top Layer w6: Q1.1 -687.17,-49.83 v1(-680.17,-56.83) ; v1(-661.17,-264.83) -661.17,-266.83 -663.17,-268.83 -644.98,-287.02 U4.7
  Bottom Layer w6: v1(-680.17,-56.83) -661.17,-75.83 v1(-661.17,-264.83)
NetQ2_3: Q2.3 U4.8 | length 471
  Top Layer w6: Q2.3@-928.17,-503.83 -843.67,-419.33 -782.44,-419.33 -773.94,-427.83 -769.17,-427.83 -729.67,-388.33 -729.67,-295.33 -708.67,-274.33 -684.91,-274.33 -650.56,-308.68 U4.8
NetR4_2: R4.2 U1.3 | length 72
  Top Layer w6: R4.2 -882.81,-661.83 U1.3
NetR6_2: R6.2 U2.7 | length 46.7
  Top Layer w6: U2.7 -237.17,-509.55 R6.2@-235.45,-507.83
NetR7_1: R7.1 U3.16 | length 81.3
  Top Layer w6: U3.16 -453.17,208.17 -430.1,231.24 R7.1
NetR8_1: R8.1 U4.27 | length 161.6
  Top Layer w6: U4.27 -478.3,-326.33 -390.7,-326.33 -353.54,-289.16 R8.1
NetR10_1: R10.1 U4.26 | length 151.1
  Top Layer w6: U4.26 -438.69,-344.11 -432.91,-338.33 -390.67,-338.33 -384.51,-344.49 R10.1
NetR11_1: R11.1 U4.24 | length 154.6
  Top Layer w6: U4.24 -438.69,-379.54 -432.91,-385.33 -380.67,-385.33 -366.17,-399.83 R11.1
NetR12_1: R12.1 U4.23 | length 84.3
  Top Layer w6: U4.23 -478.3,-397.33 -437.67,-397.33 -415.81,-419.19 R12.1
NetU2_2: U2.2 U4.2 | length 853.4
  Top Layer w6: U4.2 -517.74,-264.39 -511.17,-257.83 -428.17,-257.83 -410.17,-239.83 -410.17,-206.83 -381.17,-177.83 v1(-340.17,-177.83) ; U2.2 -115.17,-642.83 v1(-112.17,-639.83)
  Bottom Layer w6: v1(-340.17,-177.83) -340.17,-270.06 -239.91,-370.33 -232.44,-370.33 -112.17,-490.59 v1(-112.17,-639.83)
NetU2_5: U2.5 U4.1 | length 725
  Top Layer w6: U4.1 -427.37,-287.02 -386.17,-245.83 v1(-386.17,-216.83) ; v1(-208.17,-625.83) -186.17,-603.83 U2.5
  Bottom Layer w6: v1(-386.17,-216.83) -386.17,-449.98 -210.33,-625.83 v1(-208.17,-625.83)
SCK: J1.3 U3.3 U4.15 | length 1492.7
  Top Layer w6: v1(-668.17,156.17) -668.17,154.32 -648.1,134.24 U3.3 ; v1(-646.17,-460.83) -621.98,-436.63 U4.15
  Bottom Layer w6: v1(-668.17,156.17) -672.67,151.67 -702.7,151.67 -731.64,122.73 -731.64,-299.36 -709.67,-321.33 -696.44,-321.33 -646.17,-371.59 v1(-646.17,-460.83) -646.17,-478.83 -608.17,-516.83 -608.17,-707.59 -609.67,-709.09 -609.67,-870.38 -552.23,-927.83 -488.17,-927.83 -434.17,-981.83 J1.3
pads on no net: AE1.2 AE1.3 AE1.4 B1.3 B1.4 P1.3 U2.3 U2.4 U2.6 U2.9 U2.11 U2.13 U2.16 U4.9 U4.16 U4.17
copper on no net:
  other v1: -149.59,131.54 -266.16,132.85 -188.47,134.62 -304.25,141.23 -89.41,223.91 -125.55,238.56 -295.12,242.04 -164.19,243.9 -256.29,245.64 -203.09,246.56

## Polygon pours and split planes (outlines as drawn)
GND on Bottom Layer "gnd" (solid, pour order 43): -1154.88,-328.88 ccw(c-434.88,-328.88) -434.88,-1048.88 ccw(c-434.88,-328.88) 285.12,-328.88 ccw(c-434.88,-328.88) -434.88,391.12 ccw(c-434.88,-328.88)
3.3V on 3v3 "3v3" (solid, pour order 11): -1158.24,-329.35 ccw(c-438.24,-329.35) -438.24,-1049.35 ccw(c-438.24,-329.35) 281.76,-329.35 ccw(c-438.24,-329.35) -438.24,390.65 ccw(c-438.24,-329.35)
GND on GND "gnd" (solid, pour order 15): -1153.17,-331.83 ccw(c-433.17,-331.83) -433.17,-1051.83 ccw(c-433.17,-331.83) 286.83,-331.83 ccw(c-433.17,-331.83) -433.17,388.17 ccw(c-433.17,-331.83)

## Keep-outs
Keep-Out Layer:
  circle w10: c-437.17,-330.83 r720

## Other copper
Top Layer:
  pour cut-out: 336.8,-538.8 -240.8,38.8 -0.8,278.8 576.8,-298.8
GND:
  pour cut-out: -239.1,29.1 -9.1,259.1 507.5,-257.5 277.5,-487.5
3v3:
  pour cut-out: 338.5,-548.5 -239.1,29.1 0.9,269.1 578.5,-308.5
Bottom Layer:
  pour cut-out: 336.8,-549.8 -240.8,27.8 -0.8,267.8 576.8,-309.8

## Silkscreen, mask and mechanical layers (free items; w line width, h text height)
Top Overlay:
  text "*" at -611,184 h25 r90
  text "k" at -147,-272 h25 r90
  text "BagTag x01 / KevinKuwata.com" at 236,-469 h25 r90
  text "k" at -634,-686 h25
  text "*" at -93,-727 h25
  text "*" at -604,-1001 h25 r90
Bottom Overlay:
  text "+" at -861,90 h25 r180
  text "-" at -922,-237 h25 r180
  text "KevinKuwata.com" at 53,-695 h50 r270
  text "*" at -606,-1001 h25 r90
Mechanical 1:
  lines w2: -81.92,149.6 -99.86,167.54 -100.26,167.94 ; -38.74,32.88 -56.72,14.9 ; -35.2,233 -34.94,233.26 ; 56.01,100.77 76.78,121.53 ; 112.38,-29.14 133.35,-50.11 ; -100.26,167.94 -34.94,233.26 ; -100.26,167.94 -155.01,113.19 -56.72,14.9 ; -56.72,14.9 70.82,-112.64 133.35,-50.11 ; -34.94,233.26 76.78,121.53 ; 76.78,121.53 190.89,7.43 133.35,-50.11
Mechanical 2:
  text "Controlled Impedance 4 Layer Stackup all measurements in [mm] / Top Layer - 0.035 / PrePreg - 0.23 / Inner Layer 1 - 0.035 / Core - 0.93 / Inner Layer 2 - 0.035 / PrePreg - 0.23 / Bottom Layer  - 0.035  /  / 1 oz Copper all layers" at -1908,2018 h60